# EAGLE board Differential_ADC_Driver_pcb (EAGLE 7.2.0)
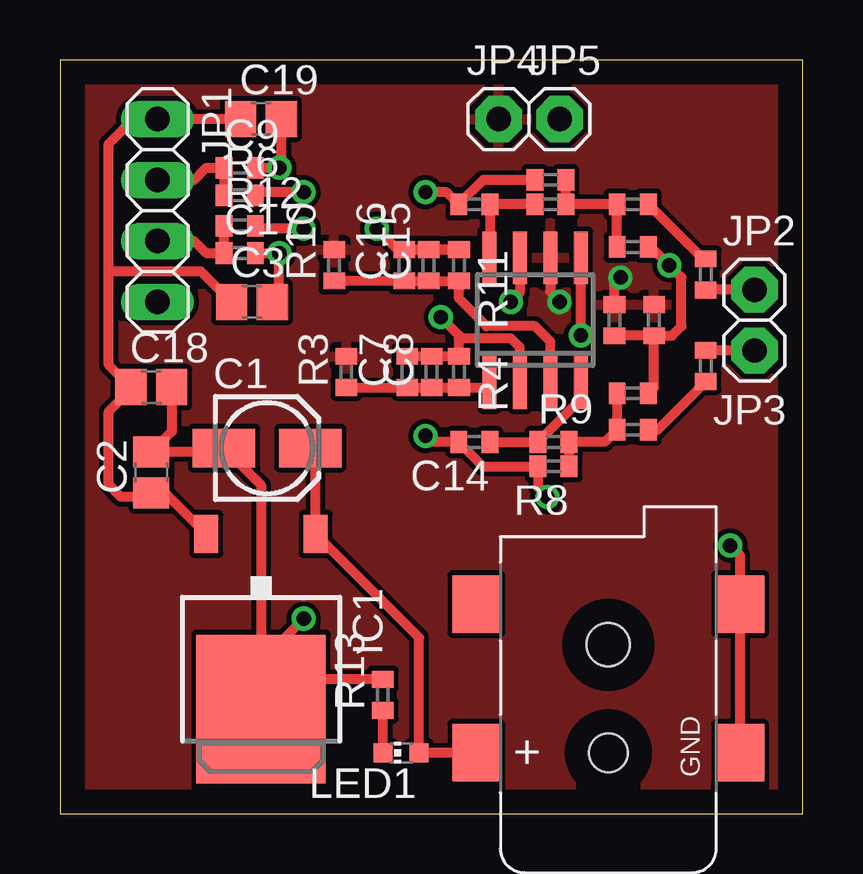
[diagram p0: board, top side]
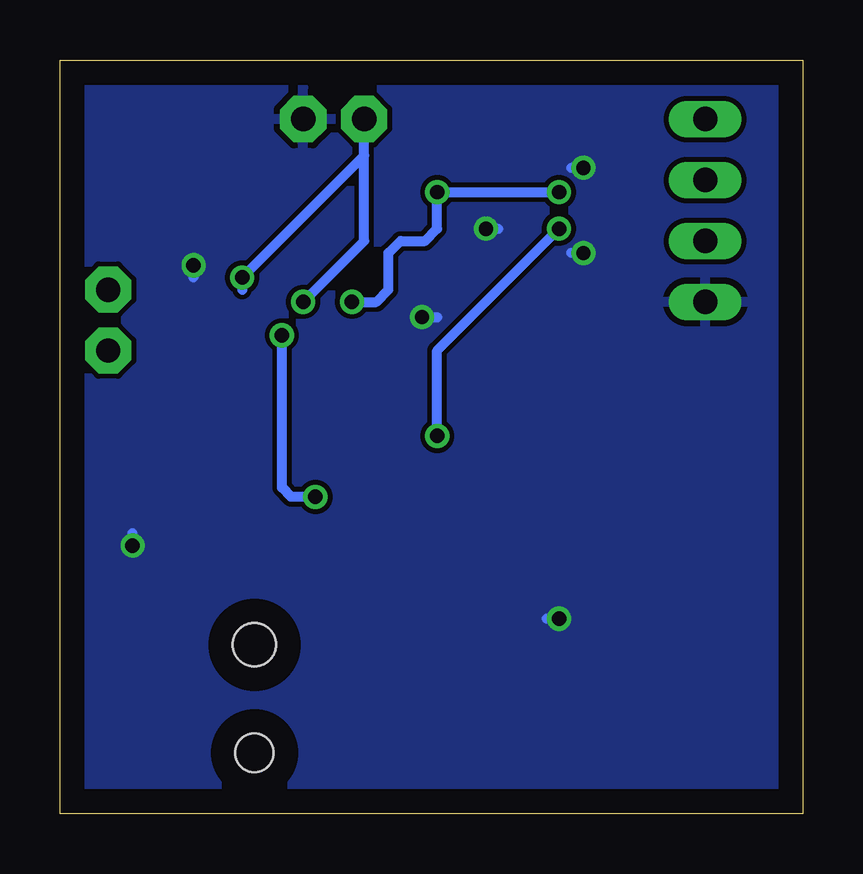
[diagram p1: board, bottom side, seen from below]

Size 30.97 x 31.42 mm. Coordinates in mm from the lower left corner, seen from the top.
Outline: 0,0 30.97,0 30.97,31.42 0,31.42 0,0
Copper layers (1*16): Top 0.035mm / dielectric 1.5mm / Bottom 0.035mm
Design rules "default": minimum track width 10mil, minimum drill 24mil, track to track 8mil, track to pad 8mil, pad to pad 8mil, via to via 8mil, smd to smd 8mil, copper to edge 40mil, drill to drill 8mil, minimum pad ring 10mil, minimum via ring 8mil, stop-mask expansion 4mil, vias tented up to drill 0mil, thermal gap 10mil

## Footprints (pad centres in the part's own frame; a part is rotated, then mirrored left to right if it is on the bottom)
153CLV-0405 = smd 2.6 x 1.6: + 1.8,0; - -1.8,0
C0805 = smd 1.3 x 1.5: 1 -0.85,0; 2 0.85,0
C0402 = smd 0.7 x 0.9: 1 -0.65,0; 2 0.65,0
DCJACK_2MM_SMT = smd 2.4 x 2: GND 0,-5.5; GNDBREAK 6.2,-5.5; PWR1 0,5.5; PWR2 6.2,5.5 | hole 1.6: 0,0 | hole 1.8: 4.5,0
TO252 = smd 1 x 1.6: 1 -2.28,-4.8; 2 2.28,-4.8 | smd 5.4 x 6.2: 3 0,2.5
SO08 = smd 0.6 x 2.2: 1 -1.905,-2.6; 2 -0.635,-2.6; 3 0.635,-2.6; 4 1.905,-2.6; 5 1.905,2.6; 6 0.635,2.6; 7 -0.635,2.6; 8 -1.905,2.6
1X04 = drill 1.016 long: 1 -3.81,0; 2 -1.27,0; 3 1.27,0; 4 3.81,0
1X01 = drill 1.016 pad 1.93 octagon: 1 0,0
CHIP-LED0603 = smd 0.8 x 0.8: A 0,-0.75; C 0,0.75
R0402 = smd 0.7 x 0.9: 1 -0.65,0; 2 0.65,0

## Placement (x,y rotation side)
C1  [153CLV-0405]  8.64,15.24 0 top
C2  [C0805]  3.81,14.22 90 top
C3  [C0805]  8,21.34 0 top
C4  [C0402]  26.92,22.48 90 top
C5  [C0402]  23.88,23.62 0 top
C6  [C0402]  17.27,25.4 180 top
C7  [C0402]  14.48,18.41 90 top
C8  [C0402]  15.49,18.41 90 top
C9  [C0402]  7.49,26.92 0 top
C10  [C0402]  24.77,20.57 270 top
C11  [C0402]  23.11,20.57 270 top
C12  [C0402]  26.92,18.67 270 top
C13  [C0402]  23.88,17.53 0 top
C14  [C0402]  17.27,15.49 180 top
C15  [C0402]  15.37,22.86 90 top
C16  [C0402]  14.35,22.86 90 top
C17  [C0402]  7.49,23.37 0 top
C18  [C0805]  3.81,17.78 0 top
C19  [C0805]  8.38,28.96 0 top
CN2  [DCJACK_2MM_SMT]  22.86,2.54 90 top
IC1  7805DT  [TO252]  8.38,6.86 180 top
IC2  OP249R  [SO08]  19.81,20.57 0 top
JP1  [1X04]  4.06,25.15 270 top
JP2  [1X01]  28.96,21.84 0 top
JP3  [1X01]  28.96,19.3 180 top
JP4  [1X01]  18.29,28.96 0 top
JP5  [1X01]  20.83,28.96 0 top
LED1  [CHIP-LED0603]  14.22,2.54 90 top
R1  [R0402]  23.88,25.4 180 top
R2  [R0402]  20.45,26.42 180 top
R3  [R0402]  11.94,18.41 90 top
R4  [R0402]  16.64,18.41 270 top
R5  [R0402]  20.45,25.4 0 top
R6  [R0402]  7.49,25.78 0 top
R7  [R0402]  23.88,16 180 top
R8  [R0402]  20.57,14.48 180 top
R9  [R0402]  20.57,15.49 0 top
R10  [R0402]  11.43,22.86 90 top
R11  [R0402]  16.64,22.86 270 top
R12  [R0402]  7.49,24.51 0 top
R13  [R0402]  13.46,4.95 90 top

## Library data of the parts
C1-C19 CN2 IC1 JP2-JP5 LED1 R1-R13 = adafruit
IC2 = linear
JP1 = pinhead

## Nets
ADC+: C9.1 JP1.2 R6.1
ADC-: C17.1 JP1.3 R12.1
GND: C1.- C2.2 C3.2 C5.2 C7.2 C8.2 C9.2 C10.2 C11.2 C13.2 C15.2 C16.2 C17.2 C18.2 C19.2 CN2.GND CN2.GNDBREAK IC1.3 IC2.2 JP1.4 JP5.1 R4.1 R11.1 R13.2
N$1: C7.1 C8.1 IC2.1 R3.1 R4.2
N$2: C4.2 R1.1
N$3: C5.1 R1.2 R2.1 R5.2
N$4: C6.1 IC2.8 R5.1
N$5: C6.2 IC2.7 R2.2 R6.2
N$6: C12.2 R7.1
N$7: C13.1 R7.2 R8.1 R9.2
N$8: C14.1 IC2.4 R9.1
N$9: C14.2 IC2.5 R8.2 R12.2
N$10: C15.1 C16.1 IC2.3 R10.1 R11.2
N$11: LED1.C R13.1
N$12: C1.+ CN2.PWR1 IC1.1 LED1.A
V+: C10.1 C11.1 IC2.6 JP4.1 R3.2 R10.2
VCC: C2.1 C3.1 C18.1 C19.1 IC1.2 JP1.1
VIN+: C4.1 JP2.1
VIN-: C12.1 JP3.1

## Tracks (layer width: path | path; a pad name or v marks a point on that pad's centre or on a via)
ADC+
  Top 0.406: R6.1 C9.1 6.1,26.92 5.59,26.42 JP1.2
ADC-
  Top 0.406: JP1.3 5.59,23.88 6.1,23.37 C17.1 R12.1
GND  (via drill 0.6)
  Top 0.406: CN2.GND CN2.GNDBREAK 28.36,10.76 v27.94,11.18 | IC1.3 8.38,13.69 C1.- 6.67,15.07 C2.2 4.66,15.92 C18.2 | IC1.3 8.38,6.35 v10.16,8.13 | R13.2 9.63,5.6 IC1.3 | C9.2 v9.14,26.92 9.23,27.01 C19.2 | C17.2 v9.14,23.37 9.14,21.63 C3.2 | C5.2 24.64,23.62 v25.4,22.86 25.91,22.35 25.91,20.32 25.51,19.92 C10.2 | C10.2 C11.2 | C7.2 C8.2 R4.1 16.64,19.81 | C16.2 C15.2 R11.1 14.08,23.51 v13.21,24.38 | 16.64,19.81 16.64,19.94 v15.88,20.7 | IC2.2 19.18,19.43 18.8,19.81 16.64,19.81 | C13.2 24.77,17.77 C10.2
  Bottom 0.406: v27.94,11.18 27.94,11.68 | v10.16,8.13 10.67,8.13 | v9.14,26.92 9.65,26.92 | v9.14,23.37 9.65,23.37 | v25.4,22.86 25.4,22.35 | v13.21,24.38 12.7,24.38 | v15.88,20.7 15.24,20.7
  pour Bottom: -0.51,-0.51 -0.51,32 31.5,32 31.5,-0.51
N$1
  Top 0.406: R3.1 C7.1 C8.1 R4.2 17.7,17.77 IC2.1
N$2
  Top 0.406: C4.2 26.8,23.13 R1.1
N$3
  Top 0.406: C5.1 R1.2 R5.2 R2.1
N$4
  Top 0.406: R5.1 C6.1 17.92,23.19 IC2.8
N$5  (via drill 0.6)
  Top 0.406: R2.2 17.64,26.42 C6.2 16.11,25.91 v15.24,25.91 | v10.16,25.91 8.27,25.91 R6.2 | IC2.7 19.18,21.72 v18.8,21.34
  Bottom 0.406: v10.16,25.91 v15.24,25.91 15.24,24.38 15.75,23.88 16.76,23.88 17.27,23.37 17.27,21.84 17.78,21.34 v18.8,21.34
N$6
  Top 0.406: R7.1 24.91,16 C12.2
N$7
  Top 0.406: C13.1 R7.2 22.72,15.49 R9.2 R8.1
N$8
  Top 0.406: C14.1 R9.1 21.72,17.29 IC2.4
N$9  (via drill 0.6)
  Top 0.406: v20.32,13.21 19.92,13.6 R8.2 17.64,14.48 C14.2 15.49,15.49 v15.24,15.75 | v21.72,19.94 IC2.5 | v10.16,24.38 8.27,24.38 R12.2
  Bottom 0.406: v20.32,13.21 21.34,13.21 21.72,13.59 v21.72,19.94 | v15.24,15.75 15.24,19.3 v10.16,24.38
N$10
  Top 0.406: R10.1 C16.1 C15.1 R11.2 16.64,21.46 17.78,20.32 19.81,20.32 20.45,19.68 IC2.3
N$11
  Top 0.406: LED1.C 13.47,4.29 R13.1
N$12
  Top 0.406: CN2.PWR1 LED1.A 14.97,7.35 IC1.1 10.66,15.01 C1.+
V+  (via drill 0.6)
  Top 0.406: C11.1 23.11,22.1 v23.37,22.35 | IC2.6 20.45,21.78 v20.83,21.34
  Bottom 0.406: 18.29,27.43 v23.37,22.35 23.37,21.84 | 18.29,27.43 18.29,28.45 JP4.1 | v20.83,21.34 18.29,23.88 18.29,27.43
  pour Top: -1.02,-1.02 -1.02,32.51 32,32.51 32,-1.02
VCC
  Top 0.406: C19.1 JP1.1 3.05,28.96 2.03,27.94 2.03,22.61 | IC1.2 4.39,13.37 C2.1 3.64,13.21 2.54,13.21 2.03,13.72 2.03,16.76 2.96,17.69 C18.1 2.03,18.71 2.03,22.61 | C3.1 5.88,22.61 2.03,22.61
VIN+
  Top 0.406: JP2.1 26.94,21.84 C4.1
VIN-
  Top 0.406: JP3.1 26.94,19.3 C12.1